# Altium PCB HVP012A.PcbDoc (part 3 of 3)
Units mil, origin at the board's own origin, x right, y up, seen from the top; angles counter-clockwise.
Board outline 2249 x 2178 mil, 4 copper layers (Top Layer, MidLayer1, MidLayer2, Bottom Layer), stack 61.2 mil thick; 91 components, 29 nets, 189 pads, 191 vias.
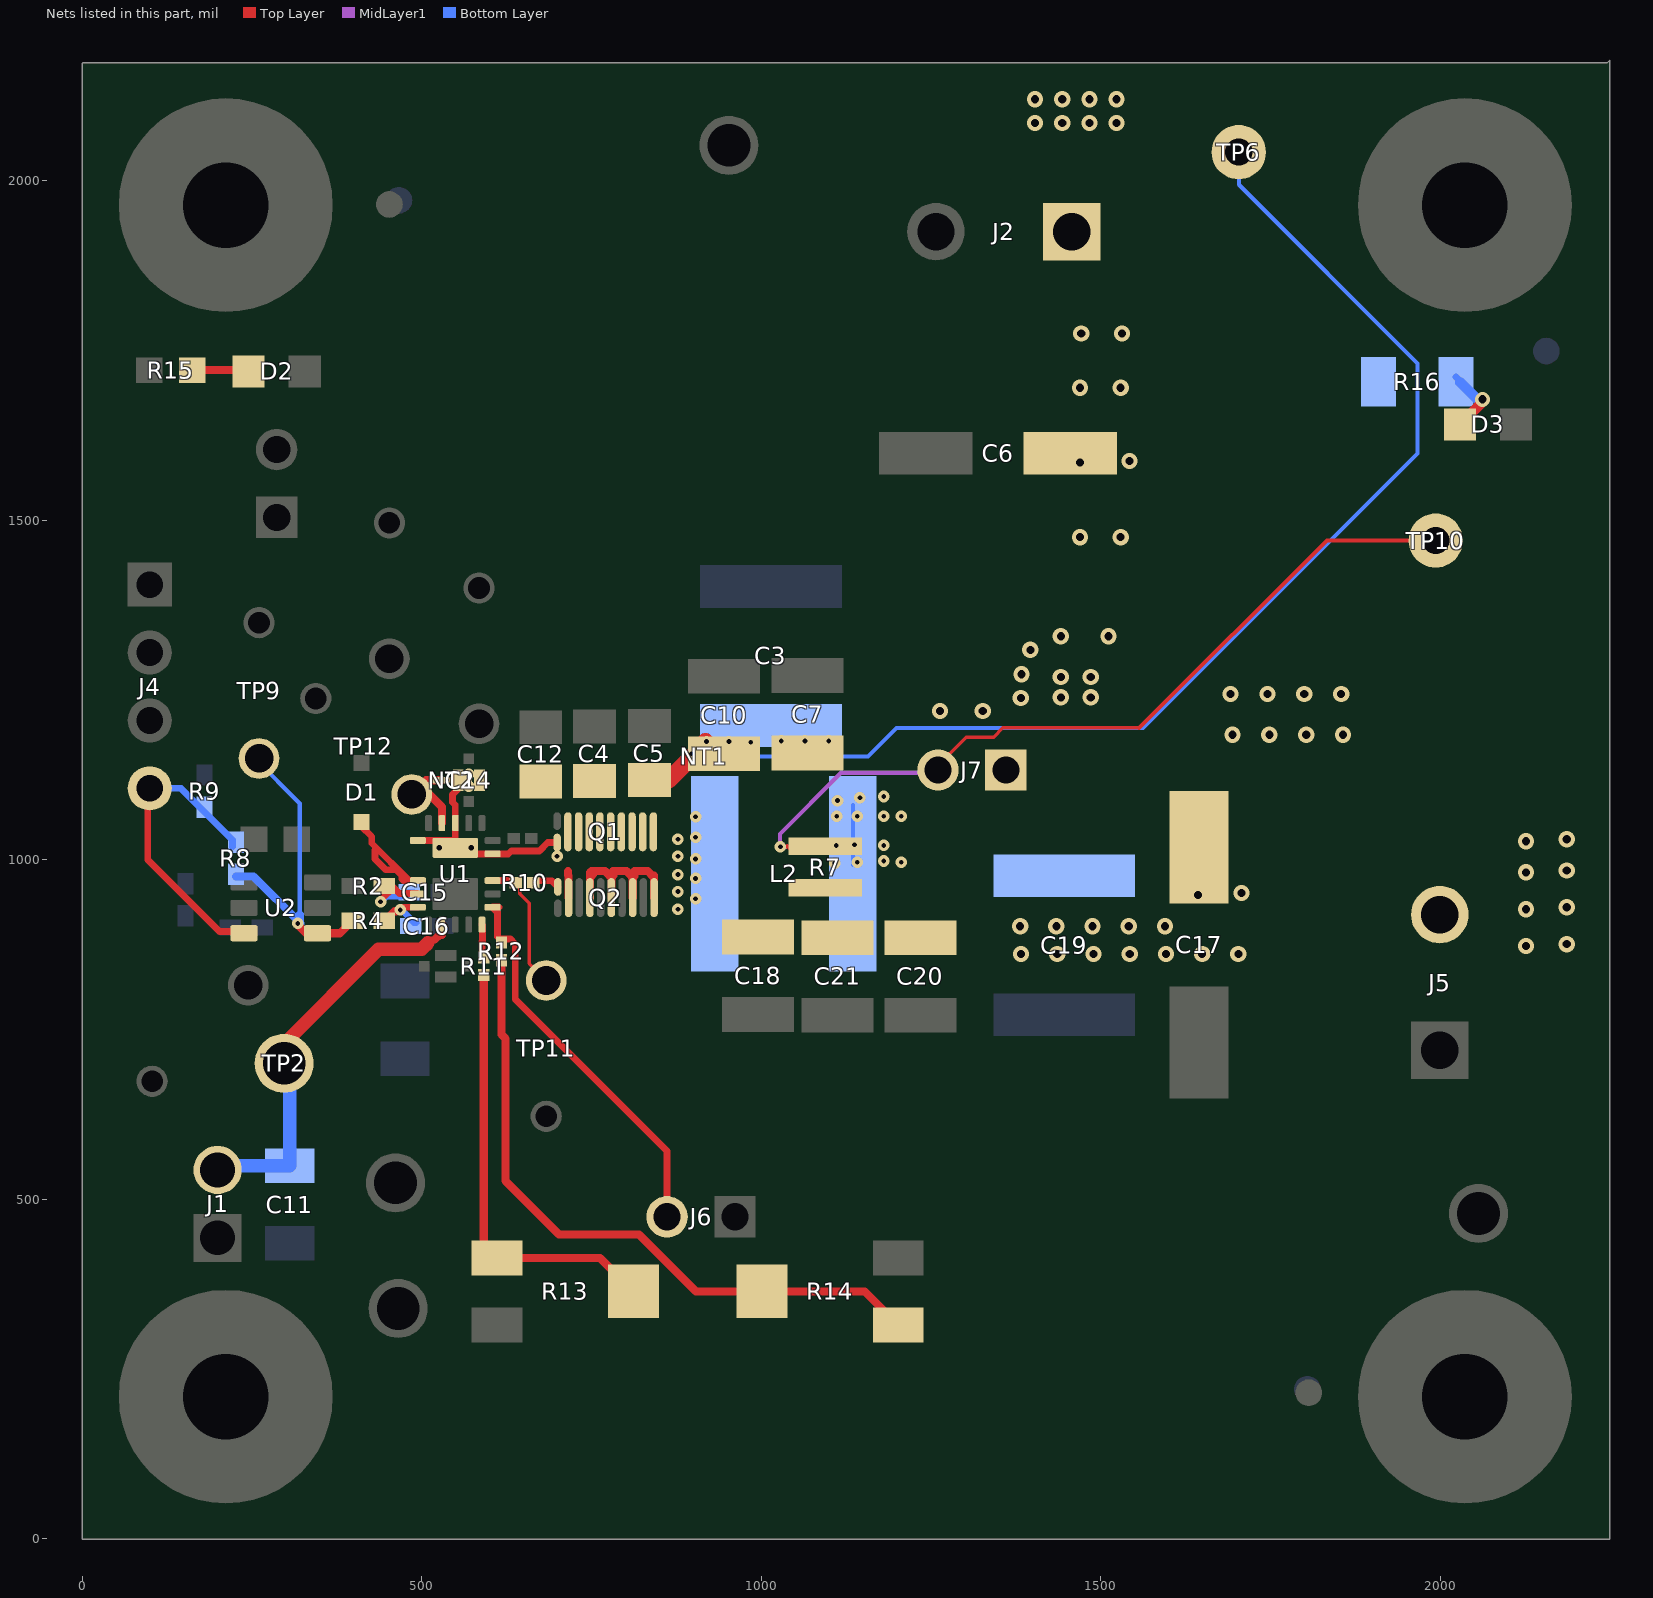
[diagram p4: the nets of this part, all layers, seen from the top]

## Via types
v1: diameter 24, hole 12, Top Layer to Bottom Layer, tented both sides, 110 vias
v2: diameter 17, hole 7, Top Layer to Bottom Layer, tented both sides, 71 vias
v3: diameter 22, hole 12, Top Layer to Bottom Layer, tented both sides, 6 vias
v4: diameter 19.68, hole 7.87, Top Layer to Bottom Layer, 4 vias

## Nets (pads, with @x,y where several pads share a name; then routed paths per layer and width w, separated by ;. In a path a pad name is that pad's centre, name@x,y a point inside that pad or via, vN(x,y) a via of type N, cw(c..) or ccw(c..) an arc to the next point about the centre after c; other vN are vias at no path point) (continued)
HS2: C14.3 L2.1 NT2.2 Q1.2 Q1.4 Q1.6 Q1.8 Q1.10 Q2.3 Q2.5 Q2.7 Q2.9 Q2.11 U1.9 U1.13 U1.16 U1.21@549,1017.39 | length 659.3
  Top Layer w10: U1.16@493.88,1028.21 U1.21@549,1028.21 ; C14.3@553.25,1117 553.25,1104.25 545,1096 545,1084.63 549,1080.63 U1.13@549,1053.8 U1.21@549,1028.21 ; Q1.2@699.13,1025.21 685.26,1025.21 672.78,1012.73 631.73,1012.73 627,1008 626.47,1008.53 U1.9@604.12,1008.53 557.86,1008.53 U1.21@549,1017.39 U1.21@549,1028.21
  Top Layer w12: 715,983 715,977.01 715.88,976.13 Q2.3@715.88,944 ; Q2.5@747.38,944 747.38,976.13 ; Q2.7@778.87,944 778.87,976.13 ; Q2.9@810.37,944 810.37,976.13 ; Q2.11@841.87,944 841.87,976.48 841.51,976.13 839.41,976.13 832.5,983.04 812.83,983.04 812.83,976.13 810.37,976.13 ; 747.38,976.13 749.83,976.13 749.83,976.48 ; 747.38,976.13 747.73,976.48 749.83,976.48 ; 747.38,976.13 747.38,980.99 748,981.61 749.83,979.78 ; 749.83,976.48 749.83,979.78 ; 749.83,976.48 750.19,976.48 750.19,979.43 ; 749.83,979.78 749.83,983.04 750.19,983.04 ; 749.83,979.78 750.19,979.43 ; 750.19,979.43 750.19,983.04 ; 750.19,979.43 751.66,977.95 751.66,983.04 ; 750.19,983.04 751.66,983.04 ; 751.66,983.04 769.51,983.04 776.06,976.48 ; 776.06,976.48 781.33,976.48 ; 776.06,976.48 776.42,976.13 ; 776.42,976.13 778.87,976.13 ; 776.42,976.13 778.87,976.13 ; 778.87,976.13 781.33,976.13 781.33,976.48 ; 781.33,976.48 781.33,983.04 781.68,983.04 ; 781.33,976.48 781.68,976.48 781.68,983.04 ; 781.68,983.04 801.01,983.04 807.56,976.48 ; 807.56,976.48 810.37,976.48 810.37,976.13 ; 807.56,976.48 807.91,976.13 810.37,976.13
  Bottom Layer w6: v2@564,1126 v2@566,1124
  other v2: 877,927 903,942.39 877,953 903,972.39 877,978 903,1001 699,1005 877,1005 877,1030 903,1033 903,1063 569,1108 569,1126
  other v4: 525.38,1017.39 572.62,1017.39
K_VIN: NT1.2 TP6.1 | length 1773.7
  Bottom Layer w6: NT1.2@930,1152 1157,1152 1199,1194 1562,1194 1966,1598 1966,1731 1703,1994 TP6.1@1703,2042
LGATE: Q2.1 R10.2 | length 39
  Top Layer w10: R10.2@664.99,969 690.92,969 Q2.1@700.13,959.79
LO: R10.1 TP11.1 U1.8 | length 197.6
  Top Layer w5: R10.1@638.01,966 644,960.01 644,950 658,936 658,847 TP11.1@683,822
  Top Layer w10: U1.8@604.12,969.16 638.85,969.16 R10.1@639.01,969
NetC11_2: C11.2 J1.2 TP2.1 U1.2 | length 600.6
  Top Layer w10: U1.2@529.21,904.2 U1.2@529.21,904.62
  Top Layer w12: 508.8,877.39 512.42,881 ; 518.78,882.22 525.79,889.22 529.31,889.22 U1.2@529.31,904.2
  Top Layer w20: TP2.1@297,700 297,729 436,868 499.42,868 508.8,877.39
  Bottom Layer w20: J1.2@199,539 209.09,549.09 C11.2@305,549.09 305,692 TP2.1@297,700
NetC15_2: C15.2 R2.2 U1.18 | length 145.5
  Top Layer w10: v2@440,939 440,941 R2.2@458,959 ; R2.2@444.62,961 456,961 R2.2@458,959 ; 466,951 R2.2@458,959 ; 467,950 493.35,950 U1.18@493.88,949.47
  Bottom Layer w10: v2(439,938) 447,946 468.57,946 C15.2@472.57,950 ; C15.2@467,950 C15.2@472.57,950 ; C15.2@477.62,950 C15.2@472.57,950 ; C15.2@488.38,951 473.57,951 C15.2@472.57,950
NetC16_1: C16.1 R4.2 U1.19 | length 92.4
  Top Layer w10: R4.2@444.62,910 459.62,925 462,922.62 465,925.62 v2@465,927 ; v2@469,926 472.79,929.79 U1.19@493.88,929.79
  Bottom Layer w10: v2@465,923.32 v2@465,927 ; v2@468,928 489,907 C16.1@491.38,907
  other v2: 468,926
NetD1_2: D1.2 U1.17 | length 189.4
  Top Layer w10: D1.2@410,1049.8 426,1033.8 426,1024.16 481,969.16 472.71,969.16 470.37,971.5 470.37,976.95 462.32,985 447,985 431,1001 431,1014
NetD2_1: D2.1 R15.2 | length 79.7
  Top Layer w12: R15.2@161.5,1721 232.66,1721 D2.1@238.66,1715
NetD3_1: D3.1 R16.2 | length 100.9
  Top Layer w10: v3@2060,1678 v3(2062,1678)
  Top Layer w15: D3.1@2028.66,1641 v3@2060,1672.34
  Bottom Layer w10: R16.2@2023.09,1711 2030,1704.09 R16.2@2029,1703.09 ; v3@2054.09,1678 v3(2062,1678)
  Bottom Layer w15: R16.2@2029,1703.09 v3@2054.09,1678
NetJ6_2: J6.2 R12.2 U1.6 | length 582.1
  Top Layer w10: U1.6@604.01,930.21 U1.6@612.92,930.21 ; R12.2@611.42,886.58 611.42,922.48 U1.6@604.12,929.79 U1.6@613.26,929.79 ; R12.2@617,882.96 630.24,882.96 637.24,875.96 637.24,794.52 861,570.75 J6.2@861,474
NetJ7_2: J7.2 L2.2 R7.1 TP10.1 | length 1282.8
  Top Layer w5: v2(1028,1019) 1036.49,1019 1037.74,1020.26 R7.1@1041,1017 ; J7.2@1260,1132 1253,1132 1301.5,1180.5 1341.95,1180.5 1355.45,1194 1556.02,1194
  Top Layer w6: 1556.02,1194 1832.71,1470 TP10.1@1993,1470
  MidLayer1 w6: v2@1035,1018 1027,1026 1027,1038 1117,1128 J7.2@1259,1128
  Bottom Layer w6: L2.2@1134.57,992 1134.57,1022 L2.2@1134.57,1080.57
  other v2: 1108,995 1141,996 1206,996 1180,998 1110,1021 1180,1021 1137,1022 1111,1064 1141,1064 1180,1064 1206,1064 1112,1087 1145,1091 1180,1093
NetNT2_1: NT2.1 TP12.1 U1.14 | length 128.5
  Top Layer w12: NT2.1@529,1117 506,1117 TP12.1@485,1096 511,1096 529.31,1077.69 U1.14@529.31,1053.8
NetR11_1: R11.1 R13.1 R13.2 | length 644.1
  Top Layer w12: R11.1@591,828.04 591,432.82 R13.1@610.61,413.21 762.18,413.21 R13.2@811.39,364
NetR11_2: R11.2 U1.5 | length 47.8
  Top Layer w10: U1.5@588.37,904.2 589,903.57 589,879.66 588.37,879.03 588.37,860.59 R11.2@591,857.96
NetR12_1: R12.1 R14.1 R14.2 | length 994.8
  Top Layer w12: R12.1@617,853.04 617,742.32 623,736.32 623,527 702,448 819.72,448 903.72,364 R14.2@1000.61,364 1152.18,364 R14.1@1201.39,314.79
PWM: R4.1 R8.2 TP9.1 U2.4 | length 491.9
  Top Layer w12: v2@316,905 329.4,891.6 U2.4@346.13,891.6 378.98,891.6 R4.1@397.38,910
  Bottom Layer w6: TP9.1@254,1149 320,1083 320,919
  Bottom Layer w12: R8.2@226,975.38 251.91,975.38 v2@320,907.28 ; v2(317,906) 321.28,906 v2@320,907.28 ; 320,919 v2@320,907.28
PWM_IN: J4.4 R8.1 R9.2 U2.3 | length 449.2
  Top Layer w10: J4.4@96,1099 96,1000 202,894 235.46,894 U2.3@237.87,891.6
  Bottom Layer w10: J4.4@99,1105 145,1105 221,1029 R8.1@221,1019
VIN: C3.1 C4.1 C5.1 C6.1 C7.1 C10.1 C12.1 J2.1 NT1.1 Q1.3 Q1.5 Q1.7 Q1.9 Q1.11 R16.1 | length 110.8
  Top Layer w10: C5.1@835,1117 863.12,1117 C5.1@866,1117
  Top Layer w25: C5.1@863.12,1117 917.41,1171.29 C10.1@917.41,1174.32
  other v1: 1263,1219 1326,1219 1382,1238 1441,1239 1485,1239 1441,1269 1485,1269 1383,1273 1396,1309 1441,1329 1511,1329 1469,1475 1529,1475 1469,1585 1542,1587 1469,1695 1529,1695 1471,1775 1531,1775 1403,2085 1443,2085 1483,2085 1523,2085 1403,2120 1443,2120 1483,2120 1523,2120
  other v2: 897.07,1155.9 984.07,1172.9 919.07,1173.9 952.07,1173.9 1029.07,1174.9 1064.07,1174.9 1099.07,1174.9
VOUT: C17.1 C18.1 C19.1 C20.1 C21.1 J5.2 J7.1 R7.2
  other v1: 1382.33,861 1435.67,861 1489,861 1542.33,861 1595.67,861 1649,861 1702.33,861 2126,872.71 2186,875.57 1381,902 1434.33,902 1487.67,902 1541,902 1594.33,902 2126,927 2186,929.86 1642.67,948 1707,951 2126,981.29 2186,984.14 2126,1027.14 2186,1030 1693.71,1184 1748,1184 1802.29,1184 1856.57,1184 1690.86,1244 1745.14,1244 1799.43,1244 1853.71,1244
pads on no net: FID1.1 FID2.1 FID3.1 FID4.1 FID5.1 FID6.1 H1.1 H2.1 H3.1 H4.1 H5.0 H6.0 H7.0 H8.0 SH-J1.0 U1.1 U1.20@530.3,949.47 U1.20@567.7,949.47 U1.21@530.3,1017.39 U1.21@567.7,1017.39

## Polygon pours and split planes (outlines as drawn)
HS2 on Bottom Layer "HS2_L04_P014" (solid, remove dead copper, pour order 14): 912,1075 882,1045 873,1045 871,1043 871,914 912,876
GND on Bottom Layer "GND_L04_P102" (solid, remove dead copper, pour order 102): 2164.33,41.8 122.33,41.8 22.33,141.8 28.33,147.8 28.33,2075.8 28.33,2077.8 101.33,2150.8 2055.33,2150.8 2234.33,1971.8 2234.33,110.8
HS2 on Bottom Layer "HS2_L04_P078" (solid, remove dead copper, pour order 78): 520,1204 532.96,1172.96 590,1155 631,1080 704,1073 704,982.06 491.65,998 443.21,1077.98 359.33,1130.33 359.33,1204
NetJ7_2 on Bottom Layer "NETJ7_2_L04_P039" (solid, pour order 39): 1099,865 1098,864 1098,734 1106,726 1169,726 1173,730 1255,859 1249,1149 1177,1139 1098,1137
VIN on Bottom Layer "Bottom Layer-No Net 7" (solid, pour order 76): 1386.49,2144 1961,2144 1961,1563.67 1934.95,1563.67 1550.44,1194.15 1541.57,1185.62 917.42,1185.62 911,1192.28 911,1230 956.33,1230 1313.99,1304.19 1317.45,1304.19 1384.55,1368.68 1386.49,1370.54
VOUT on Bottom Layer "Bottom Layer-No Net 6" (solid, pour order 42): 1871,1479 2246,1479 2246,819.43 1256,819.43 1256,1171.3 1551.61,1171.3 1561,1169
HS2 on Bottom Layer "HS2_L04_P104" (solid, remove dead copper, pour order 104): 866,914 926,914 926,1074 921,1079 866,1079
HS2 on Bottom Layer "HS2_L04_P022" (solid, pour order 22): 895,898 895,732 899,728 960,728 966,734 966,834 964,836 964,902
HS2 on MidLayer1 "HS2_L02_P016" (solid, remove dead copper, pour order 16): 520,1204 532.96,1172.96 590,1155 631,1080 704,1073 704,982.06 491.65,998 443.21,1077.98 359.33,1130.33 359.33,1204
GND on MidLayer1 "GND_L02_P082" (solid, remove dead copper, pour order 82): 2154,39 112,39 12,139 18,145 18,2073 18,2075 91,2148 2045,2148 2224,1969 2224,108
HB2 on Top Layer "HB2_L01_P092" (solid, remove dead copper, pour order 92): 582,1138 553,1109 425,1109 392,1142 392,1157 424,1189 427,1192 531,1192 554,1169 573,1169 573,1167 587,1153
NetD1_2 on Top Layer "NETD1_2_L01_P090" (solid, remove dead copper, pour order 90): 386.5,1035.5 427,995 461,961 496,961 503,968 503,978 459,1019 435,1070 392,1070 390,1072
LGATE on Top Layer "LGATE_L01_P023" (solid, pour order 23): 656,974 656,944 661,939 671,929 699.35,929 701,929 706,934 704,976 659.22,977.22
HGATE on Top Layer "HGATE_L01_P024" (solid, pour order 24): 653,1024 654.21,1025.21 701,1025.21 701,1074 667,1074 652,1059 652,1039
HS2 on Top Layer "HS2_L01_P059" (solid, remove dead copper, pour order 59): 628.05,1033.74 859.92,1044.98 900,1065 913,1060.46 913,893.02 882.19,910 820.48,944 624.53,947.6
GND on Top Layer "Top Layer-No Net 1" (solid, pour order 28): 386,2040 870.39,2040 870.39,2151 1361,2151 1361,1442.42 1090.76,1249.76 866.37,1235.5 858,1171 641,1171 641,1299 386,1684
GND on Top Layer "Top Layer-No Net 9" (solid, remove dead copper, pour order 49): 31,779 518.78,882.22 1315.36,266.34 1724,266.34 1724,-1 31,-1
VOUT on Top Layer "Top Layer-No Net 2" (solid, pour order 27): 2201,1479 1871,1479 1561,1169 1541,1169 1277,1169 1246,969 946,969 946,859 2201,842
VIN on Top Layer "Top Layer-No Net" (solid, pour order 29): 1381,2152 1381,1438.77 1239.07,1302.37 1136.32,1247.31 888,1227 888,1165 829.3,1141.2 657,1139.05 657,1090.12 681.83,1081.42 712.65,1057 877.07,1057 967,1126 1139.79,1138.79 1309,1181 1341,1188.87 1532.38,1188.87 1853,1497 1853,2152
GND on Top Layer "Top Layer-No Net 4" (solid, pour order 35): 2253.16,344.84 2253.16,329 1304.43,317.34 675.28,735.25 676.78,942.76 805.53,944.61 986,813.05 2251.68,813.05
NetJ7_2 on Top Layer "NETJ7_2_L01_P094" (solid, remove dead copper, pour order 94): 1081,989 1216,989 1221,994 1221,1079 1216,1084 1203,1097 1089,1097 1076,1084 1076,999 1086,989
no net on Bottom Solder "NONET_L-01_P-001" (solid): 1099,865 1098,864 1098,734 1106,726 1169,726 1173,730 1173,859
no net on Bottom Solder "NONET_L-01_P-001" (solid): 902,894 902,896 864,934 821,934 820,933 820,1049 821,1048 868,1048 872,1048 896,1072 909,1072 910,1073 922,1061 922,893
no net on Bottom Solder "NONET_L-01_P-001" (solid): 896,861 895,860 895,730 903,722 966,722 970,726 970,855
no net on Bottom Paste "NONET_L-01_P-001" (solid): 1099,865 1098,864 1098,734 1106,726 1169,726 1173,730 1173,859
no net on Bottom Paste "NONET_L-01_P-001" (solid): 895,875 894,874 894,744 902,736 965,736 969,740 969,869
HS2 on MidLayer2 "HS2_L03_P015" (solid, remove dead copper, pour order 15): 520,1204 532.96,1172.96 590,1155 631,1080 704,1073 704,982.06 491.65,998 443.21,1077.98 359.33,1130.33 359.33,1204
GND on MidLayer2 "GND_L03_P017" (solid, remove dead copper, pour order 17): 2154,39 112,39 12,139 18,145 18,2073 18,2075 91,2148 2045,2148 2224,1969 2224,108

## Keep-outs
Keep-Out Layer:
  the board outline again, w25
  text ".Layer_Name" at -322,-1089.49 h60

## Other copper
Top Layer:
  rectangle net NetJ6_2: 606,919 631,929
  rectangle net HS2: 470,1024 495,1034
  text ".Layer_Name" at -322,-1089.49 h60
MidLayer1:
  pour cut-out: 871,1065 870,1066 870,1162 1193,1162 1195,1160 1195,799.35 1196.35,798 872,798 869,801 869,903 871,902.42
MidLayer2:
  pour cut-out: 871,1065 870,1066 870,1162 1193,1162 1195,1160 1195,799.35 1196.35,798 872,798 869,801 869,903 871,902.42
Bottom Layer:
  pour cut-out: 926.36,1079 870,1079 870,1162 1101,1162 1101,798 982,801 962,883 900,883 869,801 872,887.92 921,887.92
  text ".Layer_Name" at -322,-1089.49 h60

## Silkscreen, mask and mechanical layers (free items; w line width, h text height)
Top Overlay:
  lines w10: 370,836 465,741 ; 371,990 374,1172 ; 371,1160 373,1160 513,1300 ; 372,831 372,870 ; 465,735 1174,732 ; 521,1301 521,1408 524,1411 ; 521,1306 548,1306 ; 525,1414 552,1414 ; 525,1415 508,1432 508,1469 520,1481 829,1481 846,1464 846,1423 834,1411 ; 616,1412 834,1412 ; 617,1307 1068,1306 ; 1129,1299 1129,1241 1185,1185 1185,929
  text "-" at 1066,2009 h80
  text "+" at 1571,2009 h80
  text "EN(HI)" at 31,1616 h30
  text "GND" at 29.27,1569 h30
  text "GND" at 29.5,1520.46 h30 r359.79
  text "PWM(LI)" at 32,1477 h30
  text "14 x 20mm" at 521,1424 h72.83
  text "+" at 2132,1062 h80 r90
  text "-" at 2153,540 h80 r90
  text ".Layer_Name" at -322,-1089.49 h60
Bottom Overlay:
  text ".Layer_Name" at -322,-1089.49 h60
Top Paste:
  text ".Layer_Name" at -322,-1089.49 h60
Bottom Paste:
  text ".Layer_Name" at -322,-1089.49 h60
Top Solder:
  rectangle: 523,1065 536,1082
  rectangle: 543,1064 556,1081
  rectangle: 562,1066 575,1083
  region: 630,1022 630,1035 613,1035 613,1022
  region: 626,1002 626,1015 609,1015 609,1002
  region: 628,963 628,976 611,976 611,963
  region: 628,943 628,956 611,956 611,943
  region: 630,918 630,931 610,931 610,918
  region: 575,896 562,896 562,879 575,879
  region: 555,896 542,896 542,879 555,879
  region: 535.32,896 522.32,896 522.32,879 535.32,879
  region: 468,936.21 468,923.21 485,923.21 485,936.21
  region: 468,955.89 468,942.89 485,942.89 485,955.89
  region: 468,976 468,963 485,963 485,976
  region: 466,1034.21 466,1021.21 483,1021.21 483,1034.21
  text ".Layer_Name" at -322,-1089.49 h60
  text ".Layer_Name" at -322,-1089.49 h60
Bottom Solder:
  text ".Layer_Name" at -322,-1089.49 h60
Drill Guide:
  text ".Layer_Name" at -322,-1089.49 h60
M1 Board Outline:
  lines w10: 1,-1 2236,-1
  lines w25: 1,-1 0,2173 1,2174 2246,2174 2249,2177 2251,4
  text ".Layer_Name" at -322,-1089.49 h60
M2 Board Dimensions:
  rectangle: -899.5,-516.5 -774.5,-391.5
  rectangle: -774.5,-641.5 -399.5,-516.5
  lines w7: -899.5,-516.5 100.5,-516.5 ; -774.5,-641.5 -774.5,-391.5 ; -649.5,-641.5 -649.5,-391.5 ; -399.5,-641.5 -399.5,-391.5 ; -149.5,-641.5 -149.5,-391.5 ; -899.5,-641.5 100.5,-641.5 100.5,-391.5 -899.5,-391.5 -899.5,-641.5
  lines w10: -899.5,-706.5 -899.5,-686.5 ; -839.5,-716.5 -899.5,-696.5 ; -839.5,-676.5 -899.5,-696.5 ; -675.42,-696.5 -899.5,-696.5 ; -123.58,-696.5 100.5,-696.5 ; 40.5,-716.5 100.5,-696.5 ; 40.5,-676.5 100.5,-696.5 ; 100.5,-706.5 100.5,-686.5
  text "1000 (mil)" at -665.42,-732.49 h60
  text ".Layer_Name" at -322,-1089.49 h60
M3 3D STEP Top:
  text ".Layer_Name" at -322,-1089.49 h60
M4 3D STEP Bottom:
  text ".Layer_Name" at -322,-1089.49 h60
M5 Assembly Top:
  lines w10: -1191,-1161.17 5409,-1161.17 ; -1191,-957.83 5411,-957.83 ; -1191,-754.5 -1191,-1364.5 2814,-1364.5 5411,-1364.5 5411,-754.5 -1190.5,-754.5 -1190.5,-1364.5 385,-1364.5 ; 1274,-1364.5 1274,-754.5 ; 2541,-957.83 2541,-754.5 ; 3381,-957.83 3381,-754.5 ; 4003,-1371 4003,-1168.17
  text "COMPONENTS MARKED 'DNP' SHOULD NOT BE POPULATED." at 254.5,-549.5 h60
  text "ASSEMBLY VARIANT:" at 254,-665 h60
  text ".VariantName" at 1290,-665 h60
  text "PCB VIEWED FROM TOP SIDE" at -1127.5,-886.67 h60
  text "BOARD #:" at 1349,-886.67 h60
  text ".PRJ_Number" at 1894.5,-886.67 h60
  text "REV:" at 2739,-886.67 h60
  text ".PCB_Rev" at 3030.5,-886.67 h60
  text "SVN REV:" at 3577,-886.67 h60
  text ".VersionControl_RevNumber" at 4083,-886.67 h60
  text "IGNORE ->" at -1127.5,-1089.49 h60
  text "PLOT NAME =" at -1127.5,-1295.33 h60
  text ".plot_File_Name" at -322,-1295.33 h60
  text "GENERATED    :" at 1351,-1295.33 h60
  text ".Print_Date" at 2220.5,-1295.33 h60
  text ".Print_Time" at 2949.5,-1295.33 h60
  text "TEXAS INSTRUMENTS" at 4214,-1295.33 h60
M6 Assembly Bottom:
  lines w10: -1191.5,-958.33 5410.5,-958.33 ; -1189.5,-1161.67 5410.5,-1161.67 ; 216.5,-1371.5 216.5,-1168.67 ; 838.5,-958.33 838.5,-755 ; 1678.5,-958.33 1678.5,-755 ; 2945.5,-1365 2945.5,-755 ; 3834.5,-1365 5410,-1365 5410,-755 -1191.5,-755 -1191.5,-1365 1405.5,-1365 5410.5,-1365 5410.5,-755
  text "COMPONENTS MARKED 'DNP' SHOULD NOT BE POPULATED." at 5203,-549 h60
  text ".VariantName" at 4159,-665 h60
  text "ASSEMBLY VARIANT:" at 5198,-665 h60
  text ".VersionControl_RevNumber" at 136.5,-887.17 h60
  text "SVN REV:" at 642.5,-887.17 h60
  text ".PCB_Rev" at 1189,-887.17 h60
  text "REV:" at 1480.5,-887.17 h60
  text ".PRJ_Number" at 2325,-887.17 h60
  text "BOARD #:" at 2870.5,-887.17 h60
  text "PCB VIEWED FROM BOTTOM SIDE" at 5347,-887.17 h60
  text "IGNORE ->" at 1648.85,-1089.49 h60
  text "TEXAS INSTRUMENTS" at 5.5,-1295.83 h60
  text ".Print_Time" at 1270,-1295.83 h60
  text ".Print_Date" at 1999,-1295.83 h60
  text "GENERATED    :" at 2868.5,-1295.83 h60
  text ".plot_File_Name" at 4541.5,-1295.83 h60
  text "PLOT NAME =" at 5347,-1295.83 h60
M9 Title Sheet:
  drawing of 56 lines, arcs and shapes, not listed
  text "1" at -159.16,7805.5 h70
  text "2" at 2336.5,7805.5 h70
  text "3" at 4825.84,7805.5 h70
  text "4" at 7332.51,7805.5 h70
  text "5" at 9831.5,7805.5 h70
  text "A" at -1315.5,6662.5 h70
  text "A" at 13484.5,6662.5 h70
  text "B" at -1315.5,4282.5 h70
  text "B" at 13484.5,4282.5 h70
  text "C" at -1315.5,1907.5 h70
  text "C" at 13484.5,1907.5 h70
  text "PROJECT TITLE:" at 10444.5,46.5 h45
  text ".PRJ_Title" at 10494.5,-86.83 h70
  text "DESIGNED FOR:" at 10444.5,-254.5 h45
  text ".PRJ_Customer" at 10494.5,-394.5 h70
  text "D" at -1315.5,-462.5 h70
  text "D" at 13484.5,-462.5 h70
  text "FILE NAME:" at 10444.5,-554.5 h45
  text ".PCB_File_Name_No_Path" at 10494.5,-674.5 h70
  text "Texas Instruments (TI) and/or its licensors do not warrant the accuracy or completeness of this specification" at 5475,-836.34 h45
  text "ENGINEER:" at 10444.5,-844.5 h45
  text "LAYOUT BY:" at 11949.5,-844.5 h45
  text "or any information contained therein. TI and/or its licensors do not warrant that this design will meet" at 5430.01,-949 h45
  text "Narendra Mehta" at 10494.5,-999.49 h70
  text "Narendra Mehta" at 12000,-999.49 h70
  text "the specifications, will be suitable for your application or fit for any particular purpose, or will operate in" at 5430.01,-1061.67 h45
  text ".Layer_Name" at -322,-1089.49 h60
  text "ALTIUM DESIGNER VERSION:" at 11949.5,-1154.5 h45
  text "an implementation. TI and/or its licensors do not warrant that the design is production worthy. You should" at 5430.01,-1174.33 h45
  text "completely validate and test your design implementation to confirm the system functionality for your application." at 5475,-1287 h45
  text ".print_Scale" at 10494.5,-1287.83 h70
  text ".Application_BuildNumber" at 12000,-1287.83 h70
  text "1" at -159.16,-1494.5 h70
  text "2" at 2336.5,-1494.5 h70
  text "3" at 4825.84,-1494.5 h70
  text "4" at 7332.51,-1494.5 h70
  text "5" at 9831.5,-1494.5 h70
  text "6" at 12336.5,-1494.5 h70
M10 Fab Notes:
  drawing of 212 lines, arcs and shapes, not listed
  text "DESIGN INFORMATION" at 11494.02,6928 h60
  text "(REFER ALSO ARRAY/PANEL PROFILING INFORMATION)" at 11132.46,6766.29 h60
  text "BOARD SIZE" at 10446.46,6762 h60
  text "2175MIL" at 10908.78,6634.18 h60
  text "X" at 11414.46,6634.18 h60
  text "2250" at 11645.78,6634.18 h60
  text "Number of Layers :" at 10849.46,6437 h60
  text "4" at 11944.27,6427 h60
  text "MIN. TRACK WIDTH:" at 10849.46,6298 h60
  text "5" at 11945.7,6298 h60
  text "MIL" at 12100.46,6298 h60
  text "MIN. CLEARANCE:" at 10849.46,6166 h60
  text "4" at 11945.7,6166 h60
  text "MIL" at 12100.46,6166 h60
  text "MIN. VIA PAD SIZE:" at 10849.46,6034 h60
  text "18" at 11915.71,6034 h60
  text "MIL" at 12100.46,6034 h60
  text "0.05mm (2MIL)" at 11544.46,5892.29 h60
  text "MINIMUM ANNULAR RING" at 10520.23,5888.01 h60
  text "EXTERNAL" at 12252.46,5888.01 h60
  text "PER" at 10720.23,5770 h60
  text "IPC-D-275 CLASS 2 LEVEL C" at 10940.23,5770 h60
  text "MIL, HOLES" at 12428.46,5657.71 h60
  text "+/-" at 12036,5657 h60
  text "+/-" at 12890,5657 h60
  text "REGISTRATION TOLERANCES:" at 10520.23,5652 h60
  text "METAL" at 11720,5652 h60
  text "5" at 12296.2,5652 h60
  text "3" at 13129.2,5652 h60
  text "MIL" at 13245.46,5652 h60
  text "NOTE:  Fill vias and plate shut then polish flat." at 10524.4,5428.4 h120
  text "MATERIAL:" at 10433.46,5093.54 h60
  text "FR-4 High Tg" at 11419.9,4953.21 h60
  text "FR-408" at 10854.46,4944.64 h60
  text "X" at 11266.46,4944.64 h60
  text "OTHER" at 12342.46,4944.64 h60
  text "62 MIL (1.6mm) +/-10%" at 11174.56,4781.92 h60
  text "THICKNESS:" at 10508.23,4777.64 h60
  text "X" at 11046.4,4777.64 h60
  text "OTHER" at 12459.46,4777.64 h60
  text "TOLERANCE:" at 10508.23,4619.64 h60
  text "X" at 11347.53,4619.64 h60
  text "ANSI IPC-6012 TYPE 3 CLASS 2" at 11534.48,4619.64 h60
  text "OTHER +/-" at 11534.46,4463.64 h60
  text "BOW & TWIST:" at 10508.23,4306.64 h60
  text "X" at 11347.53,4306.64 h60
  text "ANSI IPC-6012 TYPE 3 CLASS 2" at 11534.48,4306.64 h60
  text "OTHER +/-" at 11534.46,4148.13 h60
  text "COPPER THICKNESS (FINISHED):" at 10433.46,4012.64 h60
  text "1.4MIL (1oz)" at 11313.46,3859.92 h60
  text "2MIL (1.4oz)" at 12080.46,3859.92 h60
  text "2.8MIL (2oz)" at 12807.46,3859.92 h60
  text "OUTER:" at 10790.46,3855.64 h60
  text "X" at 12701,3849 h60
  text "X" at 11951,3719 h60
  text "1.4MIL (1oz)" at 11313.46,3702.92 h60
  text "2.8MIL (2oz)" at 12080.46,3702.92 h60
  text "N/A" at 12807,3703.29 h60
  text "INNER SIGNAL:" at 10501.38,3698.64 h60
  text "DRILLING:" at 10433.46,3559.64 h60
  text "REFERENCE:" at 10508.23,3442.64 h60
  text "X" at 11156.46,3442.64 h60
  text "AS SHOWN" at 11343.46,3442.64 h60
  text "X" at 12057.46,3442.64 h60
  text "NC_DRILL FILES" at 12194.46,3442.64 h60
  text "PTH MIN COPPER THICKNESS:" at 10508.23,3284.64 h60
  text "X" at 11858.46,3284.64 h60
  text "1MIL" at 11995.46,3284.64 h60
  text "OTHER" at 12492.46,3284.64 h60
  text "FAB NOTE:  Fill all in-pad vias and plate shut then polish flat." at -873,3189 h90
  text "BOARD FINISH:" at 10433.46,3125.64 h60
  text "SILKSCREEN:" at 10588.68,3007.64 h60
  text "X" at 11537.46,3007.64 h60
  text "TOP" at 11663.46,3007.64 h60
  text "X" at 12047.46,3007.64 h60
  text "BOTTOM" at 12174.46,3007.64 h60
  text "SILKSCREEN COLOR:" at 10588.68,2840.64 h60
  text "X" at 11536.42,2840.64 h60
  text "WHITE" at 11663.46,2840.64 h60
  text "OTHER" at 12174.46,2840.64 h60
  text "SOLDER RESIST COLOR:" at 10588.68,2670.64 h60
  text "X" at 11156.42,2511.44 h60
  text "GREEN" at 11283.46,2511.44 h60
  text "BLUE" at 11874.46,2511.44 h60
  text "OTHER" at 12412.46,2511.44 h60
  text "IMMERSION GOLD (ENIG)" at 11494.46,2322.92 h60
  text "ENEPIG" at 12832,2319.64 h60
  text "SURFACE FINISH:" at 10433.46,2318.64 h60
  text "X" at 11307.51,2318.64 h60
  text "IMM. TIN/SILVER OR EQUIV" at 10763,2161.64 h60
  text "OTHER" at 12194.46,2161.64 h60
  text "ARRAY/PANEL:" at 10433.46,1982.64 h60
  text "CUT AND TRIM PER MECH LAYER 1" at 11494.46,1978.35 h60
  text "N.C. ROUTE" at 11494.46,1826.64 h60
  text "X" at 12173.46,1826.64 h60
  text "V. SCORE" at 12360.46,1826.64 h60
  text "CERTIFICATION:" at 10433.46,1689.64 h60
  text "MATERIALS AND WORKMANSHIP FOR ALL PCBS" at 11158.46,1689.64 h60
  text "TO MEET OR EXCEED THE REQUIREMENTS OF:" at 11158.46,1591.64 h60
  text "X" at 10784.96,1455.14 h60
  text "ANSI IPC-A-600F CLASS ->" at 10923.96,1455.14 h60
  text "X" at 12563.02,1455.14 h60
  text "2" at 12681.96,1455.14 h60
  text "1" at 12366.96,1453.64 h60
  text "3" at 13035.96,1453.64 h60
  text "X" at 10787.02,1295.64 h60
  text "UL 94V-0" at 10923.96,1295.64 h60
  text "X" at 11599.02,1295.64 h60
  text "RoHS" at 11735.96,1295.64 h60
  text "OTHER" at 12380.36,1295.64 h60
  text "PER ORDER" at 12777.42,1295.64 h60
  text "ADDITIONAL REQUIREMENTS:" at 10433.46,1154.64 h60
  text "MICROSECTION:" at 10508.23,1039.64 h60
  text "YES" at 11413.96,1039.64 h60
  text "REQUIRED" at 12275.46,883.5 h60
  text "BARE BOARD ELEC. TEST:" at 10508.23,880.64 h60
  text "NONE" at 11813.96,880.64 h60
  text "X" at 12148.46,880.64 h60
  text "PER ORDER" at 12867.46,880.64 h60
  text "MANUFACTURER'S UL:" at 10508.23,723.64 h60
  text "RAIL" at 11673.96,719.35 h60
  text "METAL" at 12165.77,719.35 h60
  text "X" at 12541,719 h60
  text "SILK" at 12677.46,719.35 h60
  text ".Layer_Name" at -322,-1089.49 h60
M11 Gerber Information:
  lines w10: -1191,-1161.17 5409,-1161.17 ; -1191,-957.83 5411,-957.83 ; -1191,-754.5 -1191,-1364.5 2814,-1364.5 5411,-1364.5 5411,-754.5 -1190.5,-754.5 -1190.5,-1364.5 385,-1364.5 ; 1274,-1364.5 1274,-754.5 ; 2541,-957.83 2541,-754.5 ; 3381,-957.83 3381,-754.5 ; 4003,-1371 4003,-1168.17
  text "ALL ARTWORK VIEWED FROM TOP SIDE" at -1127.5,-886.67 h60
  text "BOARD #:" at 1349,-886.67 h60
  text ".PRJ_Number" at 1894.5,-886.67 h60
  text "REV:" at 2739,-886.67 h60
  text ".PCB_Rev" at 3030.5,-886.67 h60
  text "SVN REV:" at 3577,-886.67 h60
  text ".VersionControl_RevNumber" at 4083,-886.67 h60
  text "LAYER NAME =" at -1127.5,-1089.49 h60
  text "PLOT NAME =" at -1127.5,-1295.33 h60
  text ".plot_File_Name" at -322,-1295.33 h60
  text "GENERATED    :" at 1351,-1295.33 h60
  text ".Print_Date" at 2220.5,-1295.33 h60
  text ".Print_Time" at 2949.5,-1295.33 h60
  text "TEXAS INSTRUMENTS" at 4214,-1295.33 h60
M12 Stackup:
  drawing of 295 lines, arcs and shapes, not listed
  text "Layer" at 5497.74,6904 h60
  text "Name" at 5907.65,6904 h60
  text "Material" at 6837.4,6904 h60
  text "Thickness" at 7697.16,6904 h60
  text "Constant" at 8347,6904 h60
  text "Board Layer Stack" at 8916.86,6904 h60
  text "1" at 5497.74,6784 h60
  text "Top Overlay" at 5907.65,6784 h60
  text "2" at 5497.74,6664 h60
  text "Top Solder" at 5907.65,6664 h60
  text "Solder Resist" at 6837.4,6664 h60
  text "0.40mil" at 7697.16,6664 h60
  text "3.5" at 8347,6664 h60
  text "3" at 5497.74,6544 h60
  text "Top Layer" at 5907.65,6544 h60
  text "Copper" at 6837.4,6544 h60
  text "2.80mil" at 7697.16,6544 h60
  text "4" at 5497.74,6424 h60
  text "Dielectric1" at 5907.65,6424 h60
  text "FR-4" at 6837.4,6424 h60
  text "5.00mil" at 7697.16,6424 h60
  text "4.2" at 8347,6424 h60
  text "5" at 5497.74,6304 h60
  text "MidLayer1" at 5907.65,6304 h60
  text "Copper" at 6837.4,6304 h60
  text "2.80mil" at 7697.16,6304 h60
  text "6" at 5497.74,6184 h60
  text "Dielectric2" at 5907.65,6184 h60
  text "FR-4" at 6837.4,6184 h60
  text "40.00mil" at 7697.16,6184 h60
  text "4.2" at 8347,6184 h60
  text "7" at 5497.74,6064 h60
  text "MidLayer2" at 5907.65,6064 h60
  text "Copper" at 6837.4,6064 h60
  text "2.80mil" at 7697.16,6064 h60
  text "8" at 5497.74,5944 h60
  text "Dielectric 3" at 5907.65,5944 h60
  text "5.00mil" at 7697.16,5944 h60
  text "4.2" at 8347,5944 h60
  text "9" at 5497.74,5824 h60
  text "Bottom Layer" at 5907.65,5824 h60
  text "Copper" at 6837.4,5824 h60
  text "2.80mil" at 7697.16,5824 h60
  text "10" at 5497.74,5704 h60
  text "Bottom Solder" at 5907.65,5704 h60
  text "Solder Resist" at 6837.4,5704 h60
  text "0.40mil" at 7697.16,5704 h60
  text "3.5" at 8347,5704 h60
  text "11" at 5497.74,5584 h60
  text "Bottom Overlay" at 5907.65,5584 h60
  text ".Layer_Name" at -322,-1089.49 h60
M13 Component Bodies Top:
  text ".Layer_Name" at -322,-1089.49 h60
M14 Component Bodies Bottom:
  text ".Layer_Name" at -322,-1089.49 h60
M15 Courtyards Top:
  text ".Layer_Name" at -322,-1089.49 h60
M16 Courtyards Bottom:
  text ".Layer_Name" at -322,-1089.49 h60
Drill Drawing:
  circle w10: c4244.72,2189.32 r27.63
  circle w10: c4244.72,1567.72 r16.58
  circle w10: c4244.72,1567.72 r27.63
  lines w10: 4217.09,1291.46 4244.72,1305.27 4272.34,1291.46 4258.53,1319.08 4272.34,1346.71 4244.72,1332.9 4217.09,1346.71 4230.9,1319.08 4217.09,1291.46 ; 4217.09,1678.23 4230.9,1678.23 4230.9,1664.42 4258.53,1664.42 4258.53,1678.23 4272.34,1678.23 4272.34,1705.86 4258.53,1705.86 4258.53,1719.67 4230.9,1719.67 4230.9,1705.86 4217.09,1705.86 4217.09,1678.23 ; 4217.09,1802.55 4230.9,1802.55 4244.72,1788.74 4258.53,1802.55 4272.34,1802.55 4258.53,1816.36 4272.34,1830.18 4258.53,1830.18 4244.72,1843.99 4230.9,1830.18 4217.09,1830.18 4230.9,1816.36 4217.09,1802.55 ; 4217.09,1926.87 4230.9,1926.87 4230.9,1913.06 4258.53,1913.06 4258.53,1926.87 4272.34,1926.87 4272.34,1954.5 4258.53,1954.5 4258.53,1968.31 4230.9,1968.31 4230.9,1954.5 4217.09,1954.5 4217.09,1926.87 ; 4217.09,2051.19 4230.9,2051.19 4244.72,2037.38 4258.53,2051.19 4272.34,2051.19 4258.53,2065 4272.34,2078.82 4258.53,2078.82 4244.72,2092.63 4230.9,2078.82 4217.09,2078.82 4230.9,2065 4217.09,2051.19 ; 4217.09,2410.34 4272.34,2410.34 4272.34,2465.59 4217.09,2465.59 4217.09,2410.34 ; 4217.09,2589.91 4272.34,2589.91 4244.72,2534.66 4217.09,2589.91 ; 4228.14,1302.51 4244.72,1310.79 4261.29,1302.51 4253.01,1319.08 4261.29,1335.66 4244.72,1327.37 4228.14,1335.66 4236.43,1319.08 4228.14,1302.51 ; 4228.14,1932.39 4236.43,1932.39 4236.43,1924.11 4253.01,1924.11 4253.01,1932.39 4261.29,1932.39 4261.29,1948.97 4253.01,1948.97 4253.01,1957.26 4236.43,1957.26 4236.43,1948.97 4228.14,1948.97 4228.14,1932.39 ; 4228.14,2056.71 4236.43,2056.71 4244.72,2048.43 4253.01,2056.71 4261.29,2056.71 4253.01,2065 4261.29,2073.29 4253.01,2073.29 4244.72,2081.58 4236.43,2073.29 4228.14,2073.29 4236.43,2065 4228.14,2056.71
  lines w12: 4167,1254.16 7398.49,1254.16 ; 4167,2621.68 7398.49,2621.68 ; 4504.86,1129.84 4504.86,2746 ; 4836.86,1129.84 4836.86,2746 ; 5473.43,1129.84 5473.43,2746 ; 5732.57,1129.84 5732.57,2746 ; 6107.72,1129.84 6107.72,2746 ; 6832.05,1129.84 6832.05,2746 ; 4167,1129.84 7398.49,1129.84 7398.49,2746 4167,2746 4167,1129.84
  text "Symbol" at 4241.59,2658.98 h72
  text "Quantity" at 4542.16,2658.98 h72
  text "Finished Hole Size" at 4874.16,2658.98 h72
  text "Plated" at 5510.72,2658.98 h72
  text "Hole Type" at 5769.86,2658.98 h72
  text "Drill Layer Pair" at 6145.02,2658.98 h72
  text "Hole Tolerance" at 6869.35,2658.98 h72
  text "71" at 4542.16,2534.66 h60
  text "7.00mil (0.178mm)" at 4874.16,2534.66 h60
  text "PTH" at 5510.72,2534.66 h60
  text "Round" at 5769.86,2534.66 h60
  text "Top Layer - Bottom Layer" at 6145.02,2534.66 h60
  text "4" at 4542.16,2410.34 h60
  text "7.87mil (0.200mm)" at 4874.16,2410.34 h60
  text "PTH" at 5510.72,2410.34 h60
  text "Round" at 5769.86,2410.34 h60
  text "Top Layer - Bottom Layer" at 6145.02,2410.34 h60
  text "116" at 4542.16,2286.02 h60
  text "12.00mil (0.305mm)" at 4874.16,2286.02 h60
  text "PTH" at 5510.72,2286.02 h60
  text "Round" at 5769.86,2286.02 h60
  text "Top Layer - Bottom Layer" at 6145.02,2286.02 h60
  text "A" at 4216.31,2276.02 h55.25
  text "6" at 4542.16,2161.7 h60
  text "32.00mil (0.813mm)" at 4874.16,2161.7 h60
  text "PTH" at 5510.72,2161.7 h60
  text "Round" at 5769.86,2161.7 h60
  text "Top Layer - Bottom Layer" at 6145.02,2161.7 h60
  text "4" at 4542.16,2037.38 h60
  text "39.37mil (1.000mm)" at 4874.16,2037.38 h60
  text "PTH" at 5510.72,2037.38 h60
  text "Round" at 5769.86,2037.38 h60
  text "Top Layer - Bottom Layer" at 6145.02,2037.38 h60
  text "8" at 4542.16,1913.06 h60
  text "40.00mil (1.016mm)" at 4874.16,1913.06 h60
  text "PTH" at 5510.72,1913.06 h60
  text "Round" at 5769.86,1913.06 h60
  text "Top Layer - Bottom Layer" at 6145.02,1913.06 h60
  text "6" at 4542.16,1788.74 h60
  text "42.00mil (1.067mm)" at 4874.16,1788.74 h60
  text "PTH" at 5510.72,1788.74 h60
  text "Round" at 5769.86,1788.74 h60
  text "Top Layer - Bottom Layer" at 6145.02,1788.74 h60
  text "2" at 4542.16,1664.42 h60
  text "51.18mil (1.300mm)" at 4874.16,1664.42 h60
  text "PTH" at 5510.72,1664.42 h60
  text "Round" at 5769.86,1664.42 h60
  text "Top Layer - Bottom Layer" at 6145.02,1664.42 h60
  text "4" at 4542.16,1540.1 h60
  text "55.12mil (1.400mm)" at 4874.16,1540.1 h60
  text "PTH" at 5510.72,1540.1 h60
  text "Round" at 5769.86,1540.1 h60
  text "Top Layer - Bottom Layer" at 6145.02,1540.1 h60
  text "5" at 4542.16,1415.78 h60
  text "63.00mil (1.600mm)" at 4874.16,1415.78 h60
  text "PTH" at 5510.72,1415.78 h60
  text "Round" at 5769.86,1415.78 h60
  text "Top Layer - Bottom Layer" at 6145.02,1415.78 h60
  text "D" at 4216.31,1405.79 h55.25
  text "4" at 4542.16,1291.46 h60
  text "125.98mil (3.200mm)" at 4874.16,1291.46 h60
  text "PTH" at 5510.72,1291.46 h60
  text "Round" at 5769.86,1291.46 h60
  text "Top Layer - Bottom Layer" at 6145.02,1291.46 h60
  text "230 Total" at 4542.16,1167.14 h60
  text ".Layer_Name" at -322,-1089.49 h60

## Dimensions
2,-12 to 2252,-29 on M2 Board Dimensions
-2,-2 to -2,2172 on M2 Board Dimensions

## Text inside footprints (layer, text, board x,y; h text height)
Logo1: Bottom Overlay "For evaluation only;" at 972.15,65.48 h60; Bottom Overlay "not FCC approved for resale." at 1084.52,12.09 h60